# Altium PCB PCB_WeatherStation.PcbDoc (part 3 of 3)
Units mil, origin at the board's own origin, x right, y up, seen from the top; angles counter-clockwise.
Board outline 3900 x 3900 mil, 2 copper layers (Top Layer, Bottom Layer); 99 components, 57 nets, 297 pads, 308 vias.
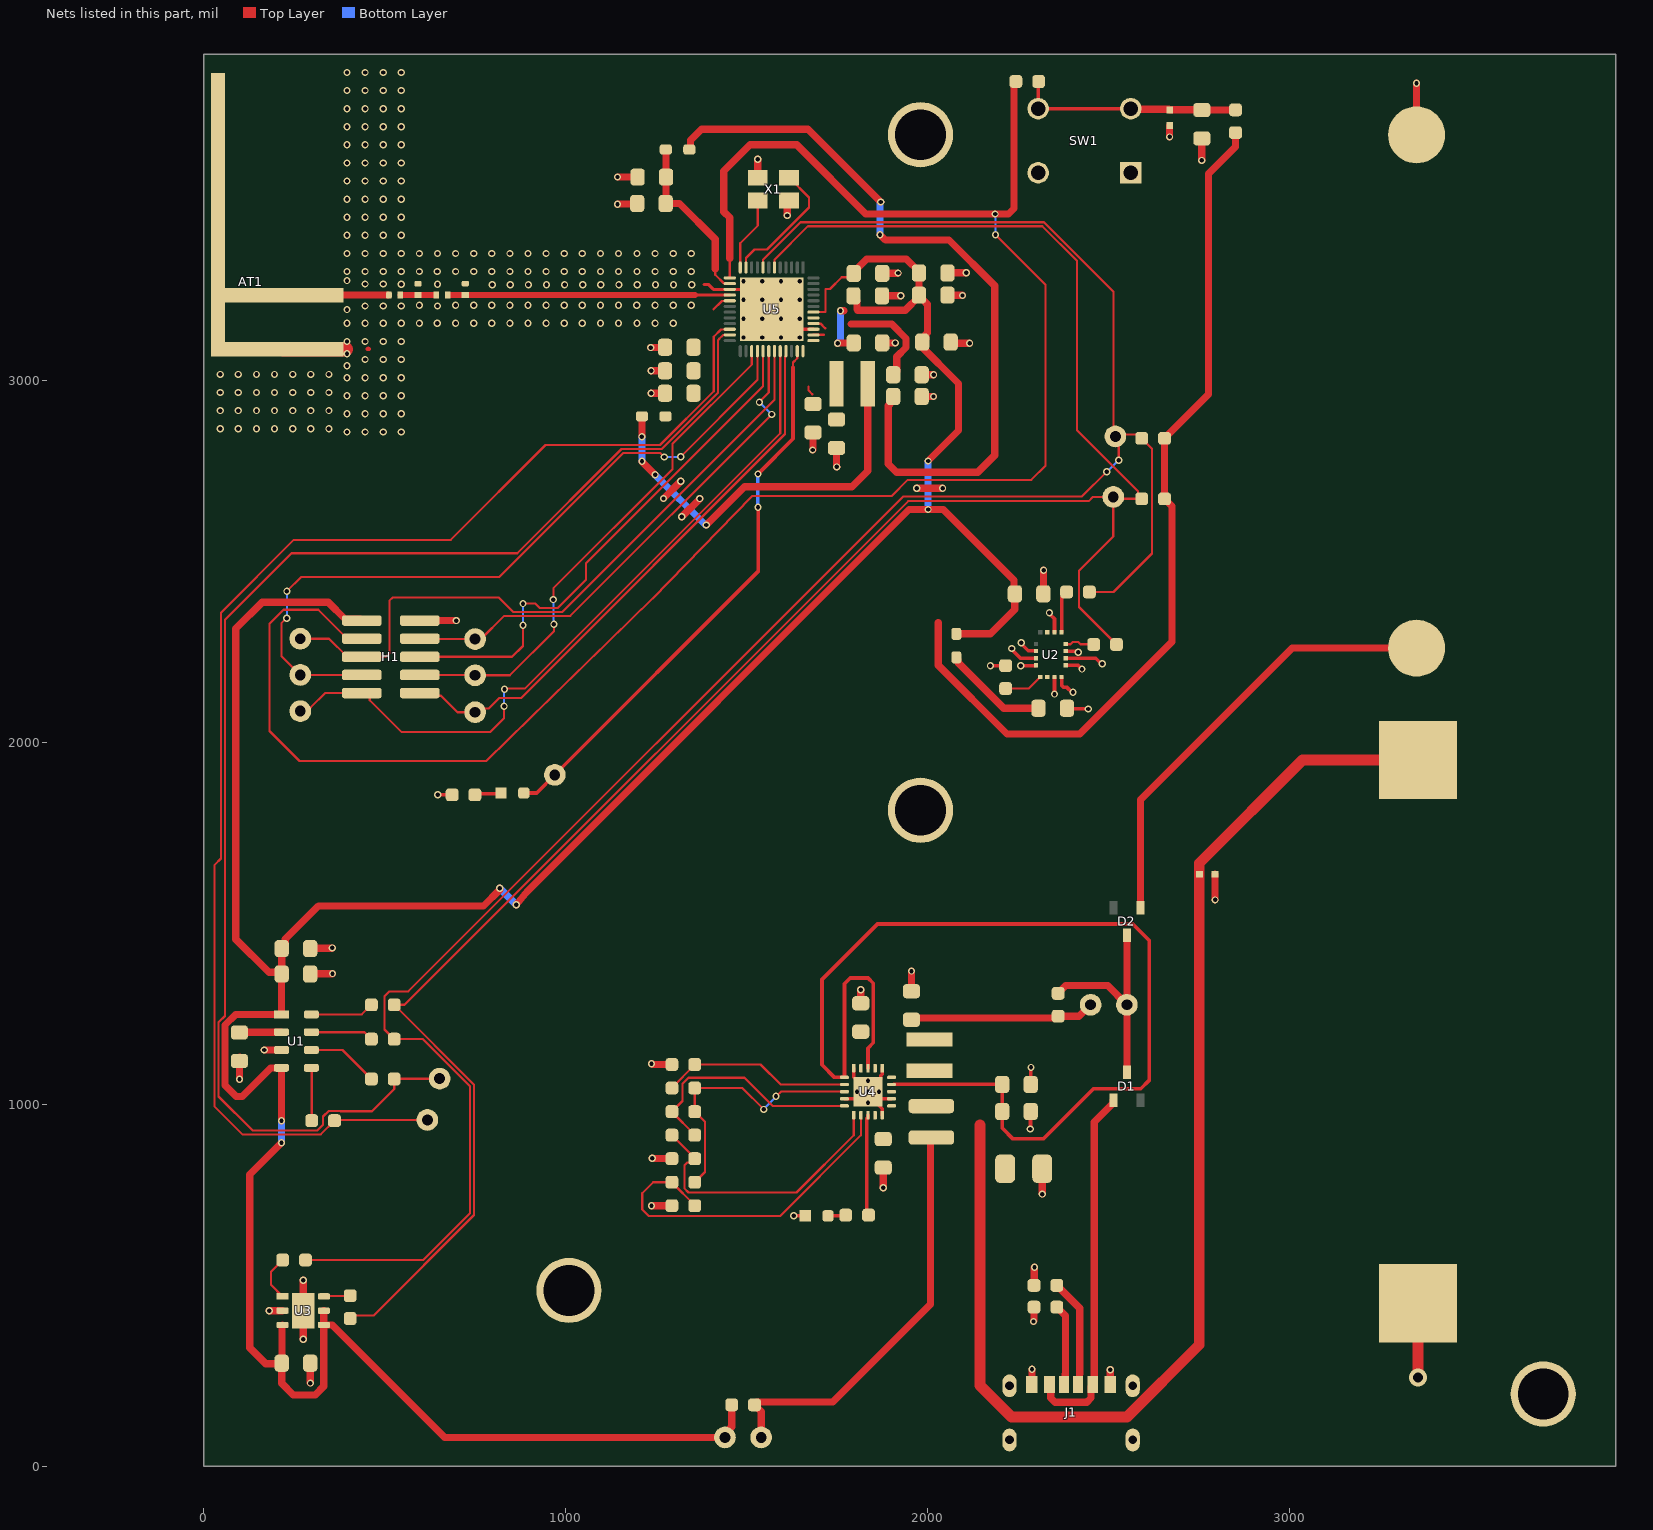
[diagram p2: the nets of this part, all layers, seen from the top]

## Part data (continued)
R23: library part R_4M75_0603, "Fixed Resistor, Metal Glaze/thick Film, 0.1W, 4750000ohm, 75V, 1% +/-Tol, 100ppm/Cel, Surface Mount, 0603", Case/Package=0603, Manufacturer=Yageo, Manufacturer Part Number=RC0603FR-074M75L, Max Operating Temperature=155°C, Min Operating Temperature=-55°C, Package Height=0.45mm, Package Length=1.6mm, Package Shape=Rectangular, Package Style=SMTMeter, Package Width=0.8mm, Power=100mW, Rated Temperature=70°C, Resistor Type="FIXED RESISTOR", Supplier Part Number=311-4.75MHRCT-ND, Temperature Coefficient=100ppm/°C, Tolerance=1%, Working Voltage=75V, Additional Feature="LASER TRIMMABLE", Category="Chip SMD Resistors", ComponentLink1Description=https://datasheet.ciiva.com:443/pdfs/VipMasterIC/IC/YAGO/YAGO-S-A0008145938/YAGO-S-A0008145938-1.pdf?src-supplier=IHS+Markit, ComponentLink1URL=https://datasheet.ciiva.com:443/pdfs/VipMasterIC/IC/YAGO/YAGO-S-A0008145938/YAGO-S-A0008145938-1.pdf?src-supplier=IHS+Markit, ComponentLink2Description=https://datasheet.ciiva.com/2455/pyu-r-int-thick-7-2455038.pdf?src-supplier=Digikey, ComponentLink2URL=https://datasheet.ciiva.com/2455/pyu-r-int-thick-7-2455038.pdf?src-supplier=Digikey, ComponentLink3Description=https://datasheet.ciiva.com/2455/pyu-r-int-thick-7-2455039.pdf?src-supplier=Digikey, ComponentLink3URL=https://datasheet.ciiva.com/2455/pyu-r-int-thick-7-2455039.pdf?src-supplier=Digikey, ComponentLink4Description=https://datasheet.ciiva.com/2455/pyu-r-int-thick-7-2455040.pdf?src-supplier=Digikey, ComponentLink4URL=https://datasheet.ciiva.com/2455/pyu-r-int-thick-7-2455040.pdf?src-supplier=Digikey, Construction=Chip, JESD-609 Code=e3, Mounting Technology="Surface Mount", Packaging="Tape and Reel", Pins=2, Pricing="1=0.1, 10=0.019, 50=0.0112, 100=0.0093, 500=0.00622, 1000=0.00532 (USD)", Reach SVHC Compliant=Yes, RoHS=Yes, RoHS Compliant=Yes, Stock=167970, Supplier=Digikey, Technology="METAL GLAZE/THICK FILM", Terminal Finish=Nickel, Termination=Wraparound
R24: library part R_4M32_0603, "Fixed Resistor, Metal Glaze/thick Film, 0.1W, 4320000ohm, 75V, 1% +/-Tol, 100ppm/Cel, Surface Mount, 0603", Case/Package=0603, Manufacturer=Vishay, Manufacturer Part Number=CRCW06034M32FKEA, Max Operating Temperature=155°C, Min Operating Temperature=-55°C, Package Height=0.45mm, Package Length=1.55mm, Package Shape=Rectangular, Package Style=SMTMeter, Package Width=0.85mm, Power=100mW, Rated Temperature=70°C, Resistor Type="FIXED RESISTOR", Supplier Part Number=541-4.32MHCT-ND, Temperature Coefficient=100ppm/°C, Tolerance=1%, Working Voltage=75V, Category="Chip SMD Resistors", ComponentLink1Description=https://datasheet.ciiva.com:443/pdfs/VipMasterIC/IC/VISH/VISH-S-A0007266705/VISH-S-A0007266705-1.pdf?src-supplier=IHS+Markit, ComponentLink1URL=https://datasheet.ciiva.com:443/pdfs/VipMasterIC/IC/VISH/VISH-S-A0007266705/VISH-S-A0007266705-1.pdf?src-supplier=IHS+Markit, ComponentLink2Description=https://datasheet.ciiva.com/5540/dcrcwe3-109170-5540878.pdf?src-supplier=Mouser, ComponentLink2URL=https://datasheet.ciiva.com/5540/dcrcwe3-109170-5540878.pdf?src-supplier=Mouser, ComponentLink3Description=https://datasheet.ciiva.com/7843/1697337-7843301.pdf?src-supplier=Element14, ComponentLink3URL=https://datasheet.ciiva.com/7843/1697337-7843301.pdf?src-supplier=Element14, ComponentLink4Description=https://datasheet.ciiva.com/22704/1697337-22704008.pdf?src-supplier=Element14, ComponentLink4URL=https://datasheet.ciiva.com/22704/1697337-22704008.pdf?src-supplier=Element14, ComponentLink5Description=https://datasheet.ciiva.com/16494/dcrcwe3-16494470.pdf?src-supplier=Future+Electronics, ComponentLink5URL=https://datasheet.ciiva.com/16494/dcrcwe3-16494470.pdf?src-supplier=Future+Electronics, ComponentLink6Description=https://datasheet.ciiva.com/9073/dcrcwe3-9073225.pdf?src-supplier=Avnet, ComponentLink6URL=https://datasheet.ciiva.com/9073/dcrcwe3-9073225.pdf?src-supplier=Avnet, ComponentLink7Description=https://datasheet.ciiva.com/2466/dcrcwe3-2466713.pdf?src-supplier=Digikey, ComponentLink7URL=https://datasheet.ciiva.com/2466/dcrcwe3-2466713.pdf?src-supplier=Digikey, ComponentLink8Description=https://datasheet.ciiva.com/2466/dcrcwe3-2466714.pdf?src-supplier=Digikey, ComponentLink8URL=https://datasheet.ciiva.com/2466/dcrcwe3-2466714.pdf?src-supplier=Digikey, ComponentLink9Description=https://datasheet.ciiva.com/2466/dcrcwe3-2466715.pdf?src-supplier=Digikey, ComponentLink9URL=https://datasheet.ciiva.com/2466/dcrcwe3-2466715.pdf?src-supplier=Digikey, ComponentLink10Description=https://datasheet.ciiva.com/3257/dcrcwe3-3257679.pdf?src-supplier=Avnet, ComponentLink10URL=https://datasheet.ciiva.com/3257/dcrcwe3-3257679.pdf?src-supplier=Avnet, Construction=Chip, JESD-609 Code=e3, Mounting Technology="Surface Mount", Packaging="Tape and Reel", Pins=2, Pricing="1=0.1, 10=0.026, 50=0.0166, 100=0.0139, 500=0.0095, 1000=0.00821 (USD)", Reach SVHC Compliant=Yes, Reference Standard=AEC-Q200, RoHS=Yes, RoHS Compliant=Yes, Stock=24135, Supplier=Digikey, Technology="METAL GLAZE/THICK FILM", Terminal Finish=Nickel, Termination=Wraparound
R25 R27: library part R_820_0603, "RES 820OHM 0.1W 0603", Case/Package=0603, Manufacturer="Stackpole Electronics", Manufacturer Part Number=RMCF0603FT820R, Max Operating Temperature=155°C, Min Operating Temperature=-55°C, Package Height=0.45mm, Package Length=1.55mm, Package Shape=Rectangular, Package Style=SMTMeter, Package Width=0.8mm, Power=100mW, Rated Temperature=70°C, Resistor Type="FIXED RESISTOR", Supplier Part Number=RMCF0603FT820RDKR-ND, Temperature Coefficient=100ppm/°C, Tolerance=1%, Working Voltage=75V, Category="Chip SMD Resistors", ComponentLink1Description=https://datasheet.ciiva.com:443/pdfs/VipMasterIC/IC/SEIE/SEIE-S-A0009541969/SEIE-S-A0009541969-1.pdf?src-supplier=IHS+Markit, ComponentLink1URL=https://datasheet.ciiva.com:443/pdfs/VipMasterIC/IC/SEIE/SEIE-S-A0009541969/SEIE-S-A0009541969-1.pdf?src-supplier=IHS+Markit, ComponentLink2Description=https://www.seielect.com/catalog/SEI-RMCF_RMCP.pdf?src-supplier=Avnet, ComponentLink2URL=https://www.seielect.com/catalog/SEI-RMCF_RMCP.pdf?src-supplier=Avnet, ComponentLink3Description=https://www.seielect.com/Catalog/SEI-RMCF_RMCP.pdf?src-supplier=Digikey, ComponentLink3URL=https://www.seielect.com/Catalog/SEI-RMCF_RMCP.pdf?src-supplier=Digikey, ComponentLink4Description=https://www.seielect.com/catalog/SEI-Packaging.pdf?src-supplier=Digikey, ComponentLink4URL=https://www.seielect.com/catalog/SEI-Packaging.pdf?src-supplier=Digikey, Construction=Rectangular, JESD-609 Code=e3, Mounting Technology="Surface Mount", Packaging="Tape and Reel", Pins=2, Pricing="1=0.1, 10=0.015, 50=0.009, 100=0.0075, 500=0.00498, 1000=0.00425 (USD)", Reach SVHC Compliant=Yes, Reference Standard=AEC-Q200, RoHS=Yes, RoHS Compliant=Yes, Stock=449150, Supplier=Digikey, Technology="METAL GLAZE/THICK FILM", Terminal Finish=Nickel, Termination=Wraparound
SW1: "6 x 6 mm, 4.3 ~ 17 mm Actuator Height, 100 ~ 260 gf, Through Hole, SPST, Tactile Switch", Manufacturer="CUI Devices", Manufacturer Part Number=TS02-66-60-BK-100-LCR-D, Supplier Part Number=2223-TS02-66-60-BK-100-LCR-D-ND, Category="Tactile Switches", Pricing="1=0.1, 10=0.097, 25=0.0916, 100=0.0833, 250=0.07832, 500=0.07166, 1000=0.05999, 2500=0.05833, 5000=0.05499 (USD)", RoHS=No, Stock=3824, Supplier=Digikey
TP2 TP3 TP4 TP5 TP6 TP7 TP8 TP9 TP10 TP11 TP12: "200 mil hole test point"
U1: library part U_MPL3115A2, "Pressure Sensor 7.25PSI ~ 15.95PSI (50kPa ~ 110kPa) Absolute 24 b 8-TLGA"
U2: library part U_AS7331, "Optical Sensor Ultraviolet (UV) 260nm ~ 360nm I2C 16-TFLGA Module", Manufacturer="Osram Opto", Manufacturer Part Number=AS7331-AQFMOLGA16LFT&R, Supplier Part Number=4991-AS7331_MOLGA16LFT&RDPCT-ND, Pricing="1=10.86, 10=8.688, 25=8.0364, 100=6.9504, 500=6.51602 (USD)", RoHS=No, Stock=1805, Supplier=Digikey
U3: library part U_Si7021, "Humidity, Temperature 0 ~ 100% RH I2C ±3% RH 18 s Surface Mount", Supplier Part Number 1=336-4380-1-ND, Supplier 1=Digikey
U4: library part U_BQ25570RGRR, "Power Supply Support Circuit, Adjustable, 1 Channel, PQCC20", Case/Package=HVQCCN, Manufacturer="Texas Instruments", Manufacturer Part Number=BQ25570RGRR, Max Operating Temperature=85°C, Max Supply Voltage=5.1V, Min Operating Temperature=-40°C, Min Supply Voltage=100mV, Package Body Material=Plastic, Package Shape=Square, Package Style="CHIP CARRIER, HEAT SINK/SLUG, VERY THIN PROFILEMeter", Peak Reflow Temperature (Cel)=260°C, Supplier Part Number=296-39934-1-ND, Temperature Grade=INDUSTRIAL, Adjustable Threshold=Yes, Category="Battery Management", Channels=1, ComponentLink1Description=https://www.ti.com:443/lit/ds/symlink/bq25570.pdf?src-supplier=IHS+Markit, ComponentLink1URL=https://www.ti.com:443/lit/ds/symlink/bq25570.pdf?src-supplier=IHS+Markit, ComponentLink2Description=https://datasheet.ciiva.com/29590/bq25570-29590060.pdf?src-supplier=Digikey, ComponentLink2URL=https://datasheet.ciiva.com/29590/bq25570-29590060.pdf?src-supplier=Digikey, Height - Seated (Max)=1mm, JESD-609 Code=e4, Length=3.5mm, Moisture Sensitivity Level=2, Number of Channels=1, Pins=20, Pricing="1=7.11, 10=6.421, 25=6.1224, 100=5.3161, 250=5.07716, 500=4.62918, 1000=4.03187 (USD)", Reach SVHC Compliant=Yes, RoHS=Yes, RoHS Compliant=Yes, Stock=9240, Supplier=Digikey, Surface Mount=Yes, Terminal Finish=Nickel, Terminal Form="No Lead", Terminal Pitch=0.5mm, Terminal Position=QUAD, Throw Configuration="POWER SUPPLY SUPPORT CIRCUIT", Width=3.5mm
U5: "BG24, 2.4 GHz, 1536kB Flash, 256kB RAM, +10 dBm, Secure Vault High, 20-bit ADC +125C, QFN48", Manufacturer="Silicon Labs", Supplier Part Number=336-EFR32BG24B110F1536IM48-B-ND, Category="RF Receivers, Transceivers", Manufacturer Part Number=EFR32BG24B110F1536IM48-B, Pricing="1=7.9, 10=7.244, 25=6.5852, 80=5.92663, 230=5.43278, 490=4.9389, 980=4.44501 (USD)", RoHS=No, Stock=2713, Supplier=Digikey
X1: library part X_39M_0302, "Parallel - Fundamental Quartz Crystal, 38.4MHz Nom", Manufacturer="Raltron Electronics", Manufacturer Part Number=RH100-38.400-10-F-1010-TR, Supplier Part Number=2151-RH100-38.400-10-F-1010-TRCT-ND, Category="Crystals and Oscillators", Pricing="1=0.24, 10=0.203, 50=0.1828, 100=0.1625, 500=0.15442, 1000=0.13004 (USD)", RoHS=Yes, Stock=14924, Supplier=Digikey

## Via types
v1: diameter 20, hole 12, Top Layer to Bottom Layer, tented both sides, 307 vias
v2: diameter 50, hole 28, Top Layer to Bottom Layer, tented both sides, 1 vias

## Nets (pads, with @x,y where several pads share a name; then routed paths per layer and width w, separated by ;. In a path a pad name is that pad's centre, name@x,y a point inside that pad or via, vN(x,y) a via of type N, cw(c..) or ccw(c..) an arc to the next point about the centre after c; other vN are vias at no path point)
+1V8: C13.1 C14.1 FB2.1 FB3.1 L3.2 U5.40 | length 3542.1
  Top Layer w7: U5.40@1684.41,3156.45 1703.55,3156.45 1717,3143
  Top Layer w20: v1(1210.52,2844) FB3.1@1210.52,2900 ; v1(1211,2776) 1211,2775 v1(1247,2739) ; FB2.1@1341.48,3637 1344.69,3640.21 1344.69,3662.69 1375,3693 1669,3693 v1(1870,3492) ; v1(1388,2600) 1493.69,2705.69 1790.69,2705.69 1834.31,2749.31 L3.2@1834.31,2990 ; 1788,3155 1900.4,3155 1939.94,3115.46 1939.94,3090.6 1914.32,3064.97 1914.32,3024.69 C13.1@1904.63,3015 ; v1(1868,3402) 1883,3387 2058.6,3387 2185,3260.6 2185,2793 2138,2746 1913.67,2746 1891,2768.67 1891,2929.66 1894.94,2933.61 1894.94,2945.31 C14.1@1904.63,2955
  Bottom Layer w20: v1(1210.52,2844) 1210.52,2776.48 v1(1211,2776) ; v1(1247,2739) 1386,2600 v1(1388,2600) ; v1(1868,3402) 1868,3490 v1(1870,3492)
+3V3: C1.1 C2.2 C4.2 C6.1 C15.1 C16.2 C17.2 C18.1 C19.2 C20.2 FB1.1 H1.1 LOAD_CURR_SENSE.2 R10.2 R11.2 R21.2 R26.2 U1.1 U1.4 U2.10 U3.3 U3.4 U3.5 U5.38 U5.41 U5.42 | length 11814.3
  Top Layer w6: U5.42@1684.41,3187.94 1717.94,3187.94 1717.94,3251.94 1729.94,3251.94 1762.22,3284.22 1780.91,3284.22 C20.2@1795.63,3298.94
  Top Layer w7: U5.38@1684.41,3124.95 1713,3124.95
  Top Layer w20: U1.1@204.33,1248.43 88.89,1248.43 59.38,1218.92 59.38,1052.62 90.22,1021.78 106.78,1021.78 185.02,1100.02 214.23,1100.02 U1.4@215,1100.79 v1(215,954.89) ; v1(215,894) 127.5,806.5 127.5,327.5 171.34,283.66 214.29,283.66 C6.1@215.63,285 215.63,229.37 247.5,197.5 308.46,197.5 332.09,221.12 U3.4@332.09,390.63 ; U1.1@215,1248.43 C1.1@215,1360.63 ; C1.1@215,1364.57 C1.1@215,1360.63 ; C1.1@215.63,1360 C1.1@215,1360.63 ; C1.1@215.63,1364.57 C2.2@215.63,1430 ; C2.2@215.63,1433.37 225.32,1443.06 225.32,1456.32 317,1548 773,1548 817.99,1592.99 v1(817.99,1597.01) ; C6.1@216.77,286.14 216.77,389.49 U3.3@217.91,390.63 ; U3.5@332.09,430 U3.4@332.09,390.63 ; H1.1@437,2336 432.5,2340.5 390.5,2340.5 344,2387 162,2387 89,2314 89,1456 180.33,1364.67 210.96,1364.67 C1.1@215,1360.63 ; v1(863.82,1551.18) 895.66,1590.1 1948.57,2643 v1(2001,2643) 2043,2643 2238.33,2447.67 2238.33,2412.3 C4.2@2240.63,2410 2240.63,2366.63 2173.48,2299.48 FB1.1@2079,2299.48 ; R26.2@1458.5,170 1458.5,109.33 1440,90.82 LOAD_CURR_SENSE.2@1440,80 666,80 355.37,390.63 U3.4@332.09,390.63 ; v1(1751,3102) 1752,3103 C16.2@1795.63,3103 ; v1(1759,3192) 1769,3192 ; C17.2@1794.63,3233 1794.63,3229.06 1804.32,3219.38 1804.32,3195.78 1806.72,3193.38 1937.94,3193.38 C18.1@1975.63,3231.06 ; C20.2@1795.63,3298.94 1831.32,3334.62 1940.94,3334.62 1975.63,3299.94 C19.2@1975.63,3296 C18.1@1975.63,3235 C18.1@1975.63,3231.06 ; C15.1@1977.66,3098.03 2085.14,2990.56 2085.14,2861.14 v1(2001,2777) ; C15.1@1984.63,3105 1994.32,3114.69 1994.32,3125.65 1999,3130.34 1999,3209.66 1987.28,3221.38 1985.32,3221.38 C18.1@1975.63,3231.06 ; 2029,2330 2029,2213 2219,2023 2419.96,2023 2674.57,2277.61 2674.57,2651.93 R10.2@2654,2672.5 R11.2@2654,2839.5 2775.5,2961 2775.5,3570 2850,3644.5 R21.2@2850,3683.5
  Bottom Layer w20: v1(215,894) v1(215,954.89) ; v1(817.99,1597.01) v1(863.82,1551.18) ; v1(1751,3102) 1759,3110 v1(1759,3192) ; v1(2001,2643) v1(2001,2777)
BAT_VOUT: BT1.1 C9.1 D3.1 U4.18 | length 3497.3
  Top Layer w30: 2144,943.35 2144,223 2231,136 2550,136 2750,336 2750,642 2750,1666 3035,1951 BT1.1@3354,1951
BQ_VOUT: C12.1 L2.2 LOAD_CURR_SENSE.1 R26.1 U4.14 | length 1148
  Top Layer w20: R26.1@1521.5,170 1540,151.5 LOAD_CURR_SENSE.1@1540,80 ; R26.1@1527.72,177.72 1737.72,177.72 2007.81,447.81 L2.2@2007.81,906.19
GND: AT1.GND BT1.2 C1.2 C2.1 C3.2 C4.1 C5.2 C6.2 C7.2 C8.2 C9.2 C10.2 C11.2 C12.2 C13.2 C14.2 C15.2 C16.1 C17.1 C18.2 C19.1 C20.1 C21.2 C22.2 C23.2 C24.2 C25.2 C26.2 C27.2 C28.2 C29.2 C30.2 D3.2 D4.2 H1.2 J1.A12 J1.B12 J1.S1 J1.S2 J1.S3 J1.S4 LED1.C MH1.1 MH2.1 MH3.1 MH4.1 PV1.2 R1.1 R6.2 R14.2 R15.2 R23.1 R24.1 R25.2 SW1.1 SW1.2 U1.3 U2.1 U2.2 U2.5 U2.6 U2.7 U2.11 U2.14 U2.15 U2.16 U3.2 U3.Paddle U4.1 U4.5 U4.9 U4.15 U4.17 U4.21 U5.15 U5.39 U5.49 X1.2 X1.4 | length 4393.3
  Top Layer w8.66: 1382,3264 1395,3264 1408.06,3250.94 U5.49@1513.74,3250.94 ; U5.49@1623.98,3140.7 U5.39@1684.41,3140.7
  Top Layer w9.45: U4.9@1770.04,1015.31 1815.31,1015.31 v1(1835,1035) ; U4.5@1795.63,1099.96 1795.63,1074.37 v1(1835,1035) ; U4.21@1854.69,1015.31 U4.17@1899.96,1015.31 ; U4.21@1863,999 1874.37,987.63 U4.15@1874.37,970.04 ; U4.1@1874.37,1099.96 1874.37,1083.63 1870.35,1079.61 1870.35,1070.35 v1(1835,1035)
  Top Layer w10: 452.3,3086 454.38,3088.09 454.69,3088.09 456.78,3086 ; v1(646.47,1854.94) R25.2@686.36,1854.94 ; U5.49@1513.74,3250.94 v1(1542.94,3221.74) U5.49@1568.86,3195.82 ; U5.49@1570.42,3197.38 U5.49@1623.98,3143.82 ; v1(1630,692) LED1.C@1661.5,692 ; v1(1835,1035) U4.21@1854.69,1015.31 ; v1(2173,2211) 2173.5,2211.5 R1.1@2215,2211.5 ; v1(2232,2259) 2232,2256.29 2256.13,2232.17 U2.6@2298.82,2232.17 ; v1(2257,2211) 2257.74,2211.74 2298.08,2211.74 U2.5@2298.82,2212.48 ; v1(2258,2275) 2258,2272.29 2271.99,2258.3 2277.85,2252.43 2298.24,2252.43 U2.7@2298.82,2251.85 ; v1(2283,932) 2283.68,932.68 2283.68,979.32 C8.2@2284.37,980 ; C7.2@2284.37,1055 2284.68,1055.32 2284.68,1101.68 v1(2285,1102) ; C4.1@2319.37,2406.06 C4.1@2319.37,2410 ; v1@2319.59,2475.41 v1(2320,2475) ; v1(2336,2358) 2336,2355.29 2350,2341.29 U2.11@2350,2304.02 ; v1(2350,2133) U2.2@2350,2180 ; U2.1@2369.69,2180 2369.69,2157.31 2375.54,2151.46 2384.84,2151.46 2398.29,2138 v1(2401,2138) ; U2.16@2381.5,2212.48 2415.14,2212.48 2425.62,2202 v1(2426,2202) ; U2.15@2381.5,2232.17 2464.13,2232.17 2479.29,2217 v1(2482,2217) ; U2.14@2381.5,2251.85 2409.55,2251.85 2412.76,2248.65 v1(2415.46,2248.65) ; C5.2@2384.37,2100.56 C5.2@2384.37,2094 2385.37,2093 2442,2093 v1(2443,2092)
  Top Layer w20: v1(99,1069) 99.5,1069.5 99.5,1119.13 100,1119.63 C3.2@100,1130.63 ; v1(167.51,1150) U1.3@215,1150 ; v1(181,430) U3.2@217.91,430 ; v1(275,351) U3.Paddle@275,430 v1(275,514) ; C6.2@294.37,285 294.37,230.63 v1(295,230) ; C1.2@294.37,1360 294.87,1360.5 355.5,1360.5 v1(356,1361) ; C2.1@294.37,1430 295.41,1431.04 354.04,1431.04 v1(355,1432) ; H1.2@597,2336 v1(698,2336) ; v1(1143,3486) 1143.96,3486.96 1196.59,3486.96 C25.2@1197.63,3488 ; v1(1143,3561) C26.2@1198.63,3561 ; v1(1235,3090) 1273.63,3090 C29.2@1274.63,3091 ; v1(1236,2964) C27.2@1274.63,2964 ; v1(1236,3026) C28.2@1274.63,3026 ; v1(1237,720) R23.1@1293.5,720 ; v1(1237,1112) 1238.35,1112 1240.35,1110 R6.2@1293.5,1110 ; v1(1239,851) 1239.5,850.5 1293,850.5 R24.1@1293.5,850 ; v1(1270.29,2673.29) v1(1318,2721) ; v1(1320.79,2622.79) 1370,2672 v1(1370,2673) ; v1(1530.28,3610.38) 1530.28,3559.71 X1.4@1530.55,3559.44 ; v1(1612,3455) 1612,3491.3 X1.2@1617.15,3496.45 ; v1(1682,2807) 1683.04,2808.04 C21.2@1683.04,2855.63 ; C22.2@1748,2812.63 1748.25,2812.38 1748.25,2760.75 v1(1748.5,2760.5) ; C11.2@1815,1279.37 v1(1815,1316.64) ; C17.1@1873.37,3233 1873.9,3233.53 v1(1925.64,3233.53) ; C20.1@1874.37,3295 1874.9,3295.53 1917.61,3295.53 v1(1918.14,3296.06) ; C16.1@1874.37,3103 v1(1909.94,3103.03) ; v1(1877,769.63) C12.2@1877,825.26 ; C10.2@1955,1312.37 v1(1955,1368) ; v1(1969.99,2701.76) v1(2041,2701.76) ; C14.2@1983.37,2955 v1(2016,2955) ; C13.2@1983.37,3015 v1(2016.27,3015) ; C18.2@2054.37,3235 2054.84,3234.53 2095.67,3234.53 v1(2096.14,3234.06) ; C19.1@2054.37,3296 2054.9,3296.53 v1(2106.64,3296.53) ; C15.2@2063.37,3105 2066.35,3102.02 v1(2115.64,3102.02) ; J1.B12@2287.65,225.76 2288,226.1 v1(2288,268) ; v1(2292.01,400) 2293.5,401.5 R14.2@2293.5,440 ; R15.2@2293.5,500 2294.25,500.75 2294.25,549.25 v1(2295,550) ; v1(2316,752) 2316.18,752.18 C9.2@2316.18,822 ; C4.1@2319.37,2410 2319.68,2410.32 2319.68,2474.68 v1(2320,2475) ; v1(2504,267) 2504,225.95 J1.A12@2504.19,225.76 ; v1(2668,3672) D4.2@2668,3703.35 ; v1(2757,3607) C30.2@2757,3667.63 ; v1(2793.65,1564.65) D3.2@2793.65,1636 ; PV1.2@3350,3677.32 v1(3350,3820)
  Top Layer w30: v2(3354,246) BT1.2@3354,451
  Top Layer w40: AT1.GND@220.5,3086 393,3086
  other v1: 1835,1004.49 1804.49,1035 1865.51,1035 1835,1065.51 396,2857 446,2857 496,2857 546,2857 46,2866 96,2866 146,2866 196,2866 246,2866 296,2866 346,2866 396,2907 446,2907 496,2907 546,2907 46,2916 96,2916 146,2916 196,2916 246,2916 296,2916 346,2916 396,2957 446,2957 496,2957 546,2957 46,2966 96,2966 146,2966 196,2966 246,2966 296,2966 346,2966 396,3007 446,3007 496,3007 546,3007 46,3016 96,3016 146,3016 196,3016 246,3016 296,3016 346,3016 396,3040 446,3057 496,3057 546,3057 396,3073 396,3107 446,3107 496,3107 546,3107 1491.1,3118.06 1542.94,3118.06 1594.78,3118.06 1646.62,3118.06 396,3157 446,3157 496,3157 546,3157 596,3157 645,3157 696,3157 746,3157 796,3157 846,3157 896,3157 946,3157 996,3157 1046,3157 1096,3157 1146,3157 1197,3157 1247,3157 1297,3157 1491.1,3169.9 1542.94,3169.9 1594.78,3169.9 1646.62,3169.9 396,3195 446,3205 496,3205 546,3205 646,3205 596,3207 696,3207 746,3207 796,3207 846,3207 896,3207 946,3207 996,3207 1046,3207 1096,3207 1146,3207 1196,3207 1247,3207 1297,3207 1347,3207 1491.1,3221.74 1594.78,3221.74 1646.62,3221.74 797,3263.42 847,3263.42 897,3263.42 947,3263.42 997,3263.42 1047,3263.42 1097,3263.42 1147,3263.42 1198,3263.42 1248,3263.42 1298,3263.42 1348,3263.42 546,3265.1 646,3265.1 446,3265.5 496,3265.5 1491.1,3273.57 1542.94,3273.57 1594.78,3273.57 1646.62,3273.57 396,3275 396,3300 446,3300 496,3300 546,3300 596,3300 645,3300 696,3300 746,3300 796,3300 846,3300 896,3300 946,3300 996,3300 1046,3300 1096,3300 1146,3300 1197,3300 1247,3300 1297,3300 1347,3300 396,3350 446,3350 496,3350 546,3350 596,3350 646,3350 696,3350 746,3350 796,3350 846,3350 896,3350 946,3350 996,3350 1046,3350 1096,3350 1146,3350 1197,3350 1247,3350 1297,3350 1347,3350 396,3400 446,3400 496,3400 546,3400 396,3450 446,3450 496,3450 546,3450 396,3500 446,3500 496,3500 546,3500 396,3550 446,3550 496,3550 546,3550 396,3600 446,3600 496,3600 546,3600 396,3650 446,3650 496,3650 546,3650 396,3700 446,3700 496,3700 546,3700 396,3750 446,3750 496,3750 546,3750 396,3800 446,3800 496,3800 546,3800 396,3850 446,3850 496,3850 546,3850
"I2C SCL": R4.1 U1.8 | length 176.8
  Top Layer w6: U1.8@297.68,1248.43 436.93,1248.43 R4.1@463.5,1275
"I2C SDA": R5.1 U1.7 | length 173.8
  Top Layer w6: U1.7@297.68,1199.21 444.29,1199.21 R5.1@463.5,1180
I2C_SCL: R4.2 R8.2 R10.1 R12.2 TP11.1 U5.6 | length 5920.6
  Top Layer w6: R12.2@405,408.5 412.99,416.49 469.05,416.49 747,694.44 747,1054.5 R4.2@526.5,1275 555.11,1275 1946.11,2666 ; U5.6@1576.73,3314.49 1576.73,3332.85 1668.89,3425 2316.53,3425 2412,3329.53 2412,2861.95 2580.74,2693.21 2580.74,2682.76 2589.42,2674.09 R10.1@2591,2672.5 2525.37,2672.5 TP11.1@2522.83,2669.96 ; 1946.15,2666 2444.56,2666 2456.06,2677.5 TP11.1@2512.5,2677.5 2512.5,2568.5 2417.91,2473.91 2417.91,2373.59 R8.2@2521.5,2270
I2C_SDA: R5.2 R7.2 R9.2 R11.1 TP12.1 U5.8 | length 6106.3
  Top Layer w6: R9.2@281.5,570 607,570 736,699 736,1049.94 605.94,1180 R5.2@526.5,1180 499.78,1206.72 499.78,1298.26 513.51,1312 565.5,1312 1932.26,2678.76 2425.76,2678.76 v1(2494.21,2747.21) ; U5.8@1545.24,3314.49 1545.24,3332.85 1648.39,3436 2321.08,3436 2513,3244.08 TP12.1@2513,2839.5 ; R7.2@2446.5,2415 2513,2415 2619.59,2521.59 2619.59,2688.76 2619.59,2810.91 2580.5,2850 2543.51,2850 2543.35,2849.83 2523.33,2849.83 TP12.1@2513,2839.5 ; v1(2527.74,2778.74) 2527.74,2824.76 TP12.1@2513,2839.5
  Bottom Layer w6: v1(2494.21,2747.21) 2495.21,2747.21 2524.06,2776.06 2525.06,2776.06 v1(2527.74,2778.74)
INT1_MPL3115A2: R19.2 TP9.1 U5.23 | length 3867.2
  Top Layer w6: R19.2@526.5,1070 526.5,1042.5 465.08,981.08 378.39,981.08 377.75,981.72 345.24,981.72 330,966.48 330,943.52 314.48,928 135.26,928 41.38,1021.88 41.38,1226.37 59,1243.99 59,2338.54 192.1,2471.64 203.16,2482.7 203.4,2482.7 242.71,2522 866.44,2522 1154.44,2810 1265.2,2810 1421,2965.8 1421,3111 1424.25,3114.25 1434.44,3124.44 1452.8,3124.44 U5.23@1453.31,3124.95 ; R19.2@527,1070.5 651.5,1070.5 TP9.1@652,1071
INT2_MPL3115A2: R20.2 TP10.1 U5.22 | length 3821.8
  Top Layer w6: R20.2@361.5,955 323.5,917 107,917 30.38,993.62 30.38,1661.41 48,1679.04 48,2358 249,2559 682.44,2559 944.44,2821 1260.64,2821 1409,2969.36 1409,3120 1429,3140 1438.13,3140 1438.32,3140.19 U5.22@1452.6,3140.19 ; R20.2@363.29,956.79 TP10.1@618.01,956.79
NetAT1_FEED: AT1.FEED L5.2 | length 244.5
  Top Layer w19.68: AT1.FEED@264.5,3235.25 L5.2@509,3235.25
NetC3_1: C3.1 U1.2 | length 115.2
  Top Layer w20: C3.1@99.84,1199.21 U1.2@215,1199.21
NetC5_1: C5.1 FB1.2 U2.3 | length 295.2
  Top Layer w6: FB1.2@2079,2225.11 FB1.2@2079,2234.52
  Top Layer w20: FB1.2@2079,2227.79 2082.78,2227.79 2082.78,2221.33 2210.11,2094 C5.1@2305.63,2094
NetC10_1: C10.1 INPUT_CURR_SENSE.2 L1.1 R13.1 U4.2 | length 512.1
  Top Layer w10: C10.1@1955,1233.63 C10.1@1959.94,1238.57 ; R13.1@2355.06,1238.57 R13.1@2360,1243.5
  Top Layer w20: C10.1@1959.94,1238.57 R13.1@2355.06,1238.57 ; R13.1@2360,1243.5 2417.86,1243.5 2449.35,1275 INPUT_CURR_SENSE.2@2450,1275
NetC11_1: C11.1 U4.4
NetC21_1: C21.1 C22.1 U5.36 | length 29
  Top Layer w6: 1671,2982 1671,2971.6 1681.23,2961.37 1681,2961.37 ; C22.1@1744.06,2891.37 C22.1@1748,2891.37
NetC23_1: C23.1 L4.1 U5.16 | length 778.9
  Top Layer w8.66: 1357.19,3235.19 U5.16@1453.31,3235.19
  Top Layer w15.75: L4.1@674.38,3235.25 C23.1@722.78,3235.25 ; C23.1@722.78,3235.25 729.36,3235.25 729.42,3235.19 1357.19,3235.19
NetC24_1: C24.1 L4.2 L5.1 | length 146.4
  Top Layer w15.75: L4.2@642.89,3235.25 C24.1@592.27,3235.25 C24.1@590.3,3235.25 ; C24.1@590.29,3235.25 L5.1@543.38,3235.25 C24.1@590.3,3235.25
NetC25_1: C25.1 C26.1 FB2.2 U5.14 | length 475.1
  Top Layer w6: 1412.99,3307 1412.99,3291.3 1437.1,3267.19 1451.96,3267.19 U5.14@1452.89,3266.27
  Top Layer w20: FB2.2@1276.52,3637 1276.94,3636.57 1276.94,3560.57 1276.87,3560.5 1276.87,3488.5 C25.1@1276.37,3488 1314.16,3488 1412.99,3389.17 1412.99,3307
NetC27_1: C27.1 C28.1 C29.1 FB3.2 U5.17 | length 55.4
  Top Layer w6: 1408,3195 1431.93,3218.93 1452.8,3218.93 U5.17@1453.31,3219.44
NetC30_1: C30.1 D4.1 R21.1 R22.1 SW1.3 SW1.4 | length 622.2
  Top Layer w10: R22.1@2306.5,3825 2305.75,3824.25 2305.75,3750.75 SW1.4@2305,3750 SW1.3@2560.9,3750 SW1.3@2562.58,3748.33 ; D4.1@2666.33,3748.33 D4.1@2668,3746.65
  Top Layer w20: SW1.3@2562.58,3748.33 D4.1@2666.33,3748.33 ; D4.1@2668,3746.65 2756.72,3746.65 C30.1@2757,3746.37 2757.06,3746.43 2849.94,3746.43 R21.1@2850,3746.5
NetD1_1: D1.1 J1.A9 J1.B9 | length 992.7
  Top Layer w20: J1.B9@2336.08,225.76 2340.05,221.79 2340.05,188.72 2351.76,177 2439.09,177 2450.8,188.72 2450.8,220.8 J1.A9@2455.76,225.76 ; J1.A9@2459.84,239 2459.84,951.18 2512.6,1003.94 D1.1@2512.6,1011.61
NetD1_3: D1.3 D2.3 INPUT_CURR_SENSE.1 R13.2 | length 599.1
  Top Layer w20: R13.2@2360,1306.5 2381.5,1327.99 2497.01,1327.99 INPUT_CURR_SENSE.1@2550,1275 ; D1.3@2550,1088.39 INPUT_CURR_SENSE.1@2550,1275 ; D2.3@2550,1466.61 INPUT_CURR_SENSE.1@2550,1275
NetD2_1: D2.1 PV1.1 | length 1234
  Top Layer w20: D2.1@2587.4,1543.39 2587.4,1841.4 3006,2260 PV1.1@3350,2260
NetH1_3: H1.3 R22.2 U5.13 | length 5445.2
  Top Layer w6: H1.3@437,2286 396.5,2286 316.5,2366 220.88,2366 182,2327.12 182,2031 265,1948 780.96,1948 1240.96,2397.96 1241.03,2398.03 1513.53,2678.39 1515.34,2680.21 1900.26,2680.21 1944.81,2724.76 2285.72,2724.76 2325,2764.04 2325,3264 v1(2187,3402) ; U5.13@1448,3283.66 1449.23,3282.43 U5.13@1453.31,3282.43 1453,3282.74 1453,3337 ; R22.2@2238,3819.5 R22.2@2243.5,3825
  Top Layer w20: 1453,3337 1453,3449.03 1436.53,3465.5 1436.53,3577.53 1509,3650 1638,3650 1829,3459 v1(2186,3459) 2223,3459 2238,3474 R22.2@2238,3819.5
  Bottom Layer w6: v1(2186,3459) 2187,3458 v1@2187,3402.51
NetH1_4: H1.4 TP3.1 U5.30 | length 1430.3
  Top Layer w6: H1.4@597,2286 597.5,2285.5 765.5,2285.5 766,2285 830,2349 1013,2349 v1(1569.48,2905.48) ; v1(1535,2939) 1535,2939.9 1560.99,2965.88 U5.30@1560.99,3080.27
  Bottom Layer w6: v1(1535,2939) 1535.48,2939 1569,2905.48 v1(1569.48,2905.48)
NetH1_5: H1.5 TP2.1 U5.31 | length 1877.3
  Top Layer w6: TP2.1@267,2286 346.5,2286 396.5,2236 H1.5@437,2236 504,2236 513,2245 513,2391 522,2400 815,2400 855,2360 990.53,2360 1576.73,2946.21 U5.31@1576.73,3080.27
NetH1_6: H1.6 U5.29 | length 1459.6
  Top Layer w6: H1.6@597,2236 852,2236 882,2266 v1(882,2323) ; v1(882,2383) 916,2383 928,2371 978,2371 1055.96,2448.96 1055.96,2494.27 1545.24,2983.55 1545.24,3030.24 1545.24,3067.67 U5.29@1545.24,3080.27
  Bottom Layer w6: v1(882,2323) v1(882,2383)
NetH1_7: H1.7 TP4.1 U5.28 | length 2060.1
  Top Layer w6: v1(229.82,2342.42) 228.66,2342.42 214.78,2328.54 214.78,2238.22 TP4.1@267,2186 H1.7@437,2186 ; v1(230,2417) 269,2456 816,2456 1159,2799 1261.03,2799 v1(1272,2788.03) ; v1(1318,2788.84) 1529.49,3000.33 U5.28@1529.49,3080.27
  Bottom Layer w6: v1(229.82,2342.42) 229.91,2342.5 229.91,2416.91 v1(230,2417) ; v1(1272,2788.03) 1272.42,2787.61 1316.77,2787.61 v1(1318,2788.84)
NetH1_8: H1.8 TP5.1 U5.27 | length 1422.3
  Top Layer w6: H1.8@597,2186 597.5,2185.5 739.5,2185.5 740,2185 845.56,2185 967.56,2307 v1(967.56,2326) ; v1(966,2394) 966,2425 1295,2754 1295,2824.25 1513.74,3042.99 U5.27@1513.74,3080.27
  Bottom Layer w6: v1(966,2394) 966,2327.56 v1(967.56,2326)
NetH1_9: H1.9 TP6.1 U5.32 | length 2011.1
  Top Layer w6: TP6.1@267,2086 277.33,2096.33 296.33,2096.33 336,2136 447.81,2136 458.99,2124.82 458.99,2116.01 547,2028 791,2028 830,2067 v1(830,2099.25) ; v1(831.08,2146.17) 833.76,2148.85 887.95,2148.85 1592.48,2853.38 U5.32@1592.48,3080.27
  Bottom Layer w6: v1(830,2099.25) 829.36,2099.89 829.36,2144.44 v1(831.08,2146.17)
NetH1_10: H1.10 TP8.1 U5.33 | length 1579.1
  Top Layer w6: H1.10@597,2136 604.49,2128.51 655.49,2128.51 701,2083 TP8.1@750,2083 760.33,2093.33 787.28,2093.33 816.2,2122.25 876.91,2122.25 1605.81,2851.15 1605.81,3064.53 1608.23,3066.95 U5.33@1608.23,3080.27
NetJ1_A5: J1.A5 R14.1 | length 225.8
  Top Layer w20: R14.1@2356.5,440 2380.32,416.18 2380.32,255.26 2380.02,254.96 2380.02,229.54 J1.A5@2376.24,225.76
NetJ1_B5: J1.B5 R15.1 | length 302.1
  Top Layer w20: R15.1@2356.5,500 2419.69,436.81 2419.69,255.26 2419.39,254.96 2419.39,229.54 J1.B5@2415.61,225.76
NetL1_2: L1.2 U4.20
NetL2_1: L2.1 U4.16 | length 0.5
  Top Layer w10: L2.1@2009.65,995.35 L2.1@2010,995
NetL3_1: L3.1 U5.37
NetLED1_A: LED1.A R27.1 | length 51.2
  Top Layer w10: LED1.A@1724.5,692 1771.5,692 R27.1@1773.5,694 R27.1@1774.5,694.99
NetLED2_A: LED2.A TP7.1 U5.35 | length 1554.5
  Top Layer w6: 1628,3035 1628,3049 1639.73,3060.73 U5.35@1639.73,3080.27
  Top Layer w10: LED2.A@884.36,1859.94 919.94,1859.94 TP7.1@970,1910 1531.46,2471.46 1531.46,2648.54 v1(1531,2649) ; v1(1531.04,2740.96) 1628,2837.92 1628,3035
  Bottom Layer w6: v1@1530.95,2740.87 v1(1531.04,2740.96)
  Bottom Layer w10: v1@1530.95,2740.87 1531.02,2740.8 v1(1531,2649)
NetLED2_C: LED2.C R25.1 | length 74.1
  Top Layer w10: R25.1@751.86,1857.44 LED2.C@818.86,1857.44
  Top Layer w20: R25.1@749.36,1854.94 R25.1@751.86,1857.44 ; LED2.C@818.86,1857.44 LED2.C@821.36,1859.94
NetR1_2: R1.2 U2.4 | length 108.7
  Top Layer w6: R1.2@2215,2148.5 2279.13,2148.5 U2.4@2310.63,2180
NetR3_1: R3.1 R6.1 U4.7 | length 527.5
  Top Layer w6: R3.1@1293.5,1045 1293.5,1046 1356.5,1109 R6.1@1356.5,1110 1538.34,1110 1593.65,1054.69 U4.7@1770.04,1054.69
NetR3_2: R3.2 R17.2 R18.2 U4.8 | length 742.9
  Top Layer w6: R18.2@1356.5,785 1384.76,813.26 1384.76,951.74 R17.2@1356.5,980 R3.2@1356.5,1045 1488,1045 v1(1547,986) ; v1(1581,1022) 1581.87,1022 1594.87,1035 U4.8@1770.04,1035
  Bottom Layer w6: v1(1547,986) 1547,987 1581,1021 v1(1581,1022)
NetR7_1: R7.1 U2.12 | length 116.7
  Top Layer w10: U2.12@2369.69,2304.02 2369.69,2399.09 2383.5,2412.91 R7.1@2383.5,2415
NetR8_1: R8.1 U2.13 | length 82.8
  Top Layer w6: U2.13@2381.5,2271.54 2382.26,2270.77 2394.54,2270.77 2400.77,2277 2415.53,2277 2421.76,2270.77 2457.74,2270.77 R8.1@2458.5,2270
NetR9_1: R9.1 U3.1 | length 127.3
  Top Layer w6: U3.1@217.91,469.37 186,501.28 186,537.5 R9.1@218.5,570
NetR12_1: R12.1 U3.6 | length 73.8
  Top Layer w6: U3.6@332.09,469.37 333.15,470.43 403.94,470.43 R12.1@405,471.5
NetR16_1: R16.1 R24.2 U4.11 | length 784
  Top Layer w6: R16.1@1293.5,915 1356.5,852.01 R24.2@1356.5,850 1345.8,839.3 1336.22,839.3 1327.91,830.99 1327.91,767.97 1339.46,756.41 1637.41,756.41 1795.63,914.63 U4.11@1795.63,970.04
NetR16_2: R16.2 R17.1 U4.10 | length 666.6
  Top Layer w6: R16.2@1356.5,915 1356.5,916 1293.5,979 R17.1@1293.5,980 1322.83,1009.32 1322.83,1056.95 1339.46,1073.59 1493.88,1073.59 1571.84,995.63 U4.10@1770.04,995.63
NetR18_1: R18.1 R23.2 U4.12 | length 990.1
  Top Layer w6: R23.2@1356.5,720 1356.5,721 1293.5,784 R18.1@1293.5,785 1242,785 1211.5,754.5 1211.5,709.44 1229.53,691.41 1592.41,691.41 1815.31,914.31 U4.12@1815.31,970.04
NetR19_1: R19.1 U1.6 | length 199
  Top Layer w6: U1.6@297.68,1150 383.5,1150 R19.1@463.5,1070
NetR20_1: R20.1 U1.5 | length 146.1
  Top Layer w6: U1.5@297.68,1100.79 298.5,1099.96 R20.1@298.5,955
NetR27_2: R27.2 U4.13 | length 279.9
  Top Layer w10: U4.13@1835,970.04 1835,963.5 1831.04,959.54 1831.04,699.46 R27.2@1836.5,694
NetU5_11: U5.11 X1.3 | length 363.1
  Top Layer w6: U5.11@1497.99,3311.37 1497.99,3337.48 1521.51,3361 1556,3361 1672,3477 1672,3504.6 X1.3@1617.17,3559.44
NetU5_12: U5.12 X1.1 | length 201.7
  Top Layer w6: U5.12@1482.76,3315 1482.25,3315.51 1482.25,3378.66 1530.53,3426.95 X1.1@1530.53,3496.45
VOUT_EN: C7.1 C8.1 U4.3 U4.6 U4.19 | length 3180.8
  Top Layer w10: U4.3@1835,1099.96 1835,1155.08 1849.62,1169.7 1849.62,1334.39 1835.14,1348.87 1785.87,1348.87 1770.04,1333.04 U4.6@1770.04,1074.37 1742.63,1074.37 1708,1109 1708,1345 1861.19,1498.19 2566.36,1498.19 2611.3,1453.25 2611.3,1065.86 2588.63,1043.19 2457.58,1043.19 2318.89,904.5 2235.5,904.5 2205.63,934.37 C8.1@2205.63,980 C7.1@2205.63,1055 1908.74,1055 1908.71,1054.96 U4.19@1906.77,1054.96
pads on no net: D1.2 D2.2 U2.8 U2.9 U5.1 U5.2 U5.3 U5.4 U5.5 U5.7 U5.9 U5.10 U5.18 U5.19 U5.20 U5.21 U5.24 U5.25 U5.26 U5.34 U5.43 U5.44 U5.45 U5.46 U5.47 U5.48

## Polygon pours and split planes (outlines as drawn)
NetL2_1 on Top Layer "NETL2_1_L01_P026" (solid, pour order 26): 1888,1001 1917,1001 1931,1015 2073,1015 2073,975 1904,975 1888,991
NetC5_1 on Top Layer "NETC5_1_L01_P036" (solid, pour order 36): 2324.4,2185.92 2324.47,2185.85 2336.16,2185.85 2336.16,2173.84 2325.81,2113.99 2326.12,2070 2286,2070 2286,2135.83 2324.38,2174.2
+1V8 on Top Layer "+1V8_L01_P020" (solid, pour order 20): 1927,3053 1927,2930 1924,2927 1814,2927 1814,3053
NetC21_1 on Top Layer "NETC21_1_L01_P034" (solid, pour order 34): 1654,3097 1654,2887.8 1714,2888.77 1714,2870.77 1773,2870.77 1773,2912.77 1718,2912.77 1718,2963.77 1662,3019.77 1662,3097
NetL1_2 on Top Layer "NETL1_2_L01_P022" (solid, pour order 22): 1889,1070 1911,1070 2067,1070 2067,1113 1923,1113 1889,1079
+3V3 on Top Layer "+3V3_L01_P028" (solid, pour order 28): 1705.94,3128.38 1816,3128.38 1816,3079 1748.27,3079 1705.94,3121.33
GND on Top Layer "GND_L01_P009" (solid, pour order 9): 15.29,3026 15.29,2847 557,2847 557,3146 1329.09,3146 1412,3224 1438,3235.48 1485.3,3246.6 1357.61,3360 557,3360 557,3884.71 386,3884.71 386,3026
NetC27_1 on Top Layer "NETC27_1_L01_P033" (solid, pour order 33): 1259,2886 1331,2886 1395,2950 1395,3126 1426,3157 1426,3217.28 1334,3126 1334,2940 1308,2914 1259,2914
BAT_VOUT on Top Layer "BAT_VOUT_L01_P025" (solid, pour order 25): 2134.2,591.58 2084,643 2084,1028 1888,1028 1889,1039 2172,1039 2172,931 2241,862 2241,687 2154,591.58
+3V3 on Top Layer "+3V3_L01_P023" (solid, pour order 23): 2019,2342 2222,2434 2260,2434 2260,2405 2336,2329 2336,2298 2324,2298 2324,2320 2263.63,2320 2219.63,2282 2019,2282
+3V3 on Top Layer "+3V3_L01_P030" (solid, pour order 30): 1670,3168 1814,3168 1814,3256 1775,3256 1736,3217 1736,3176 1670,3176
+3V3 on Top Layer "+3V3_L01_P031" (solid, pour order 31): 1671,3184 1728,3184 1728,3223 1776,3271 1815,3271 1815,3315.25 1812.25,3318 1766,3318 1712,3264 1712,3192 1671,3192
+1V8 on Top Layer "+1V8_L01_P029" (solid, pour order 29): 1744,3160.07 1752,3165 1900.4,3165 1903,3139 1716.99,3139 1704.55,3152.67 1700.58,3160.07
NetL3_1 on Top Layer "NETL3_1_L01_P027" (solid, pour order 27): 1671,3113 1671,3028 1728,2971 1728,2927 1767,2927 1767,3053 1754,3053 1701,3106 1701,3113
NetC10_1 on Top Layer "NETC10_1_L01_P013" (solid, pour order 13): 1850,1090 1850,1134 1900,1184 1900,1255 2067,1255 2067,1199 2067,1161 1921,1161 1859,1099 1859,1090
NetC11_1 on Top Layer "NETC11_1_L01_P012" (solid, pour order 12): 1810,1089 1820,1089 1820,1170 1838,1188 1838,1212 1791,1212 1791,1131 1810,1112
BQ_VOUT on Top Layer "BQ_VOUT_L01_P010" (solid, pour order 10): 1885,884 2073,884 2073,929 1884,929 1859,954 1859,980 1850,980 1850,886 1852,884
GND on Bottom Layer "GND_L02_P000" (solid, pour order 0): 0,3026 386,3026 386,3900 3900,3899.94 3900,-0.06 0,-0.06

## Keep-outs
Keep-Out Layer:
  the board outline again, w10

## Silkscreen, mask and mechanical layers (free items; w line width, h text height)
Top Overlay:
  text "Team 3 - LPHR / Tommy Ramirez / Jake Uyechi / CU Boulder / ECEN5833 SP'24" at 585,3398 h40